# EAGLE board board-newparts-later-ripped-routed (EAGLE 9.5.2), part 1 of 2
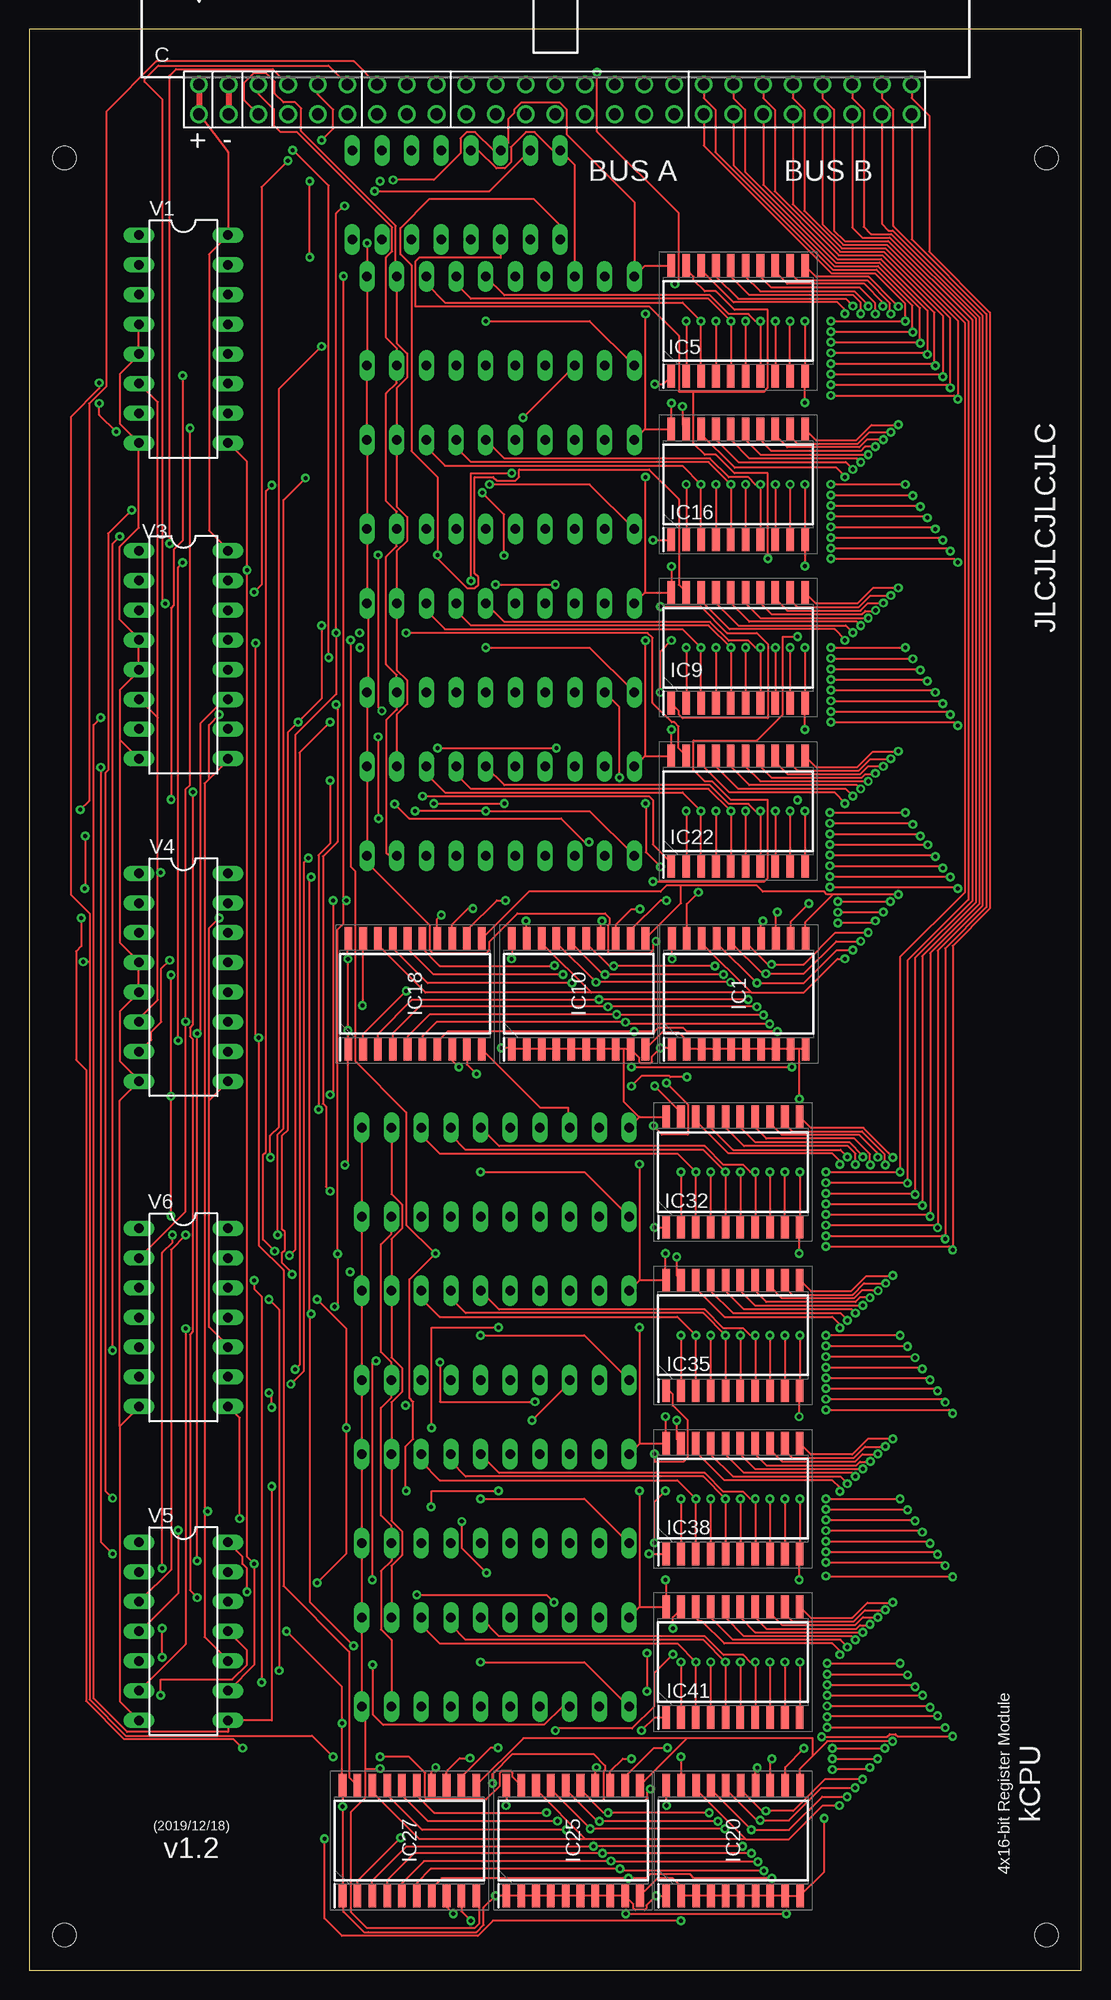
[diagram p0: board, top side]
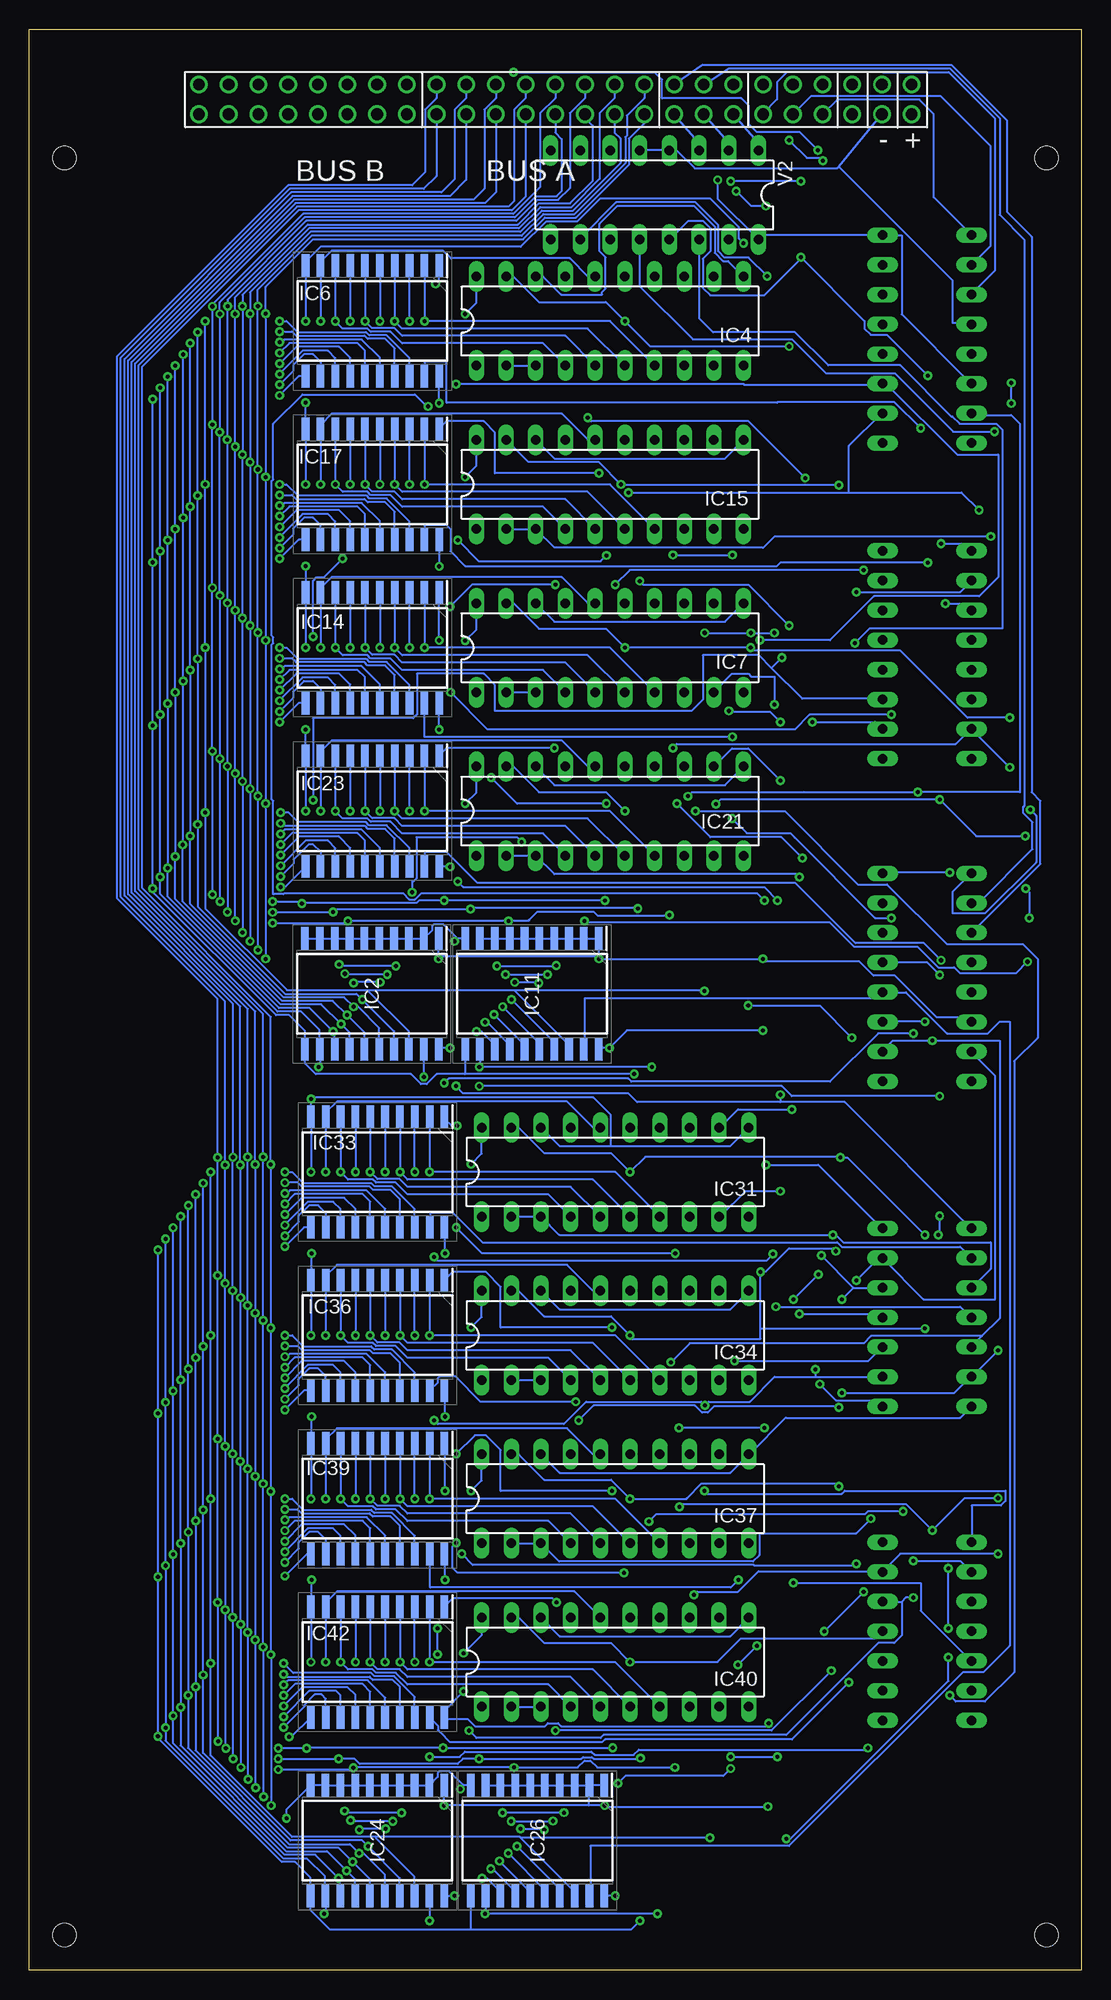
[diagram p1: board, bottom side, seen from below]

Size 90 x 166 mm. Coordinates in mm from the lower left corner, seen from the top.
Outline: 0,0 90,0 90,166 0,166 0,0
Copper layers (1*16): Top 0.035mm / dielectric 1.5mm / Bottom 0.035mm
Design rules "default *": minimum track width 6mil, minimum drill 0.35mm, track to track 6mil, track to pad 6mil, pad to pad 6mil, via to via 6mil, smd to smd 6mil, copper to edge 40mil, drill to drill 6mil, minimum pad ring 10mil, minimum via ring 8mil, stop-mask expansion 4mil, vias tented up to drill 0mil, thermal gap 10mil
Holes 2 mm at 87,155 3,155 3,3 87,3

## Footprints (pad centres in the part's own frame; a part is rotated, then mirrored left to right if it is on the bottom)
PAK100/2500-5-50 = drill 1 pad 1.422: 1 -30.48,-1.27; 2 -30.48,1.27; 3 -27.94,-1.27; 4 -27.94,1.27; 5 -25.4,-1.27; 6 -25.4,1.27; 7 -22.86,-1.27; 8 -22.86,1.27; 9 -20.32,-1.27; 10 -20.32,1.27; 11 -17.78,-1.27; 12 -17.78,1.27; 13 -15.24,-1.27; 14 -15.24,1.27; 15 -12.7,-1.27; 16 -12.7,1.27; 17 -10.16,-1.27; 18 -10.16,1.27; 19 -7.62,-1.27; 20 -7.62,1.27; 21 -5.08,-1.27; 22 -5.08,1.27; 23 -2.54,-1.27; 24 -2.54,1.27; 25 0,-1.27; 26 0,1.27; 27 2.54,-1.27; 28 2.54,1.27; 29 5.08,-1.27; 30 5.08,1.27; 31 7.62,-1.27; 32 7.62,1.27; 33 10.16,-1.27; 34 10.16,1.27; 35 12.7,-1.27; 36 12.7,1.27; 37 15.24,-1.27; 38 15.24,1.27; 39 17.78,-1.27; 40 17.78,1.27; 41 20.32,-1.27; 42 20.32,1.27; 43 22.86,-1.27; 44 22.86,1.27; 45 25.4,-1.27; 46 25.4,1.27; 47 27.94,-1.27; 48 27.94,1.27; 49 30.48,-1.27; 50 30.48,1.27
SOIC127P1030X265-20N = smd 1.95 x 0.65: 1 -4.725,5.715; 2 -4.725,4.445; 3 -4.725,3.175; 4 -4.725,1.905; 5 -4.725,0.635; 6 -4.725,-0.635; 7 -4.725,-1.905; 8 -4.725,-3.175; 9 -4.725,-4.445; 10 -4.725,-5.715; 11 4.725,-5.715; 12 4.725,-4.445; 13 4.725,-3.175; 14 4.725,-1.905; 15 4.725,-0.635; 16 4.725,0.635; 17 4.725,1.905; 18 4.725,3.175; 19 4.725,4.445; 20 4.725,5.715
DIL20 = drill 0.813 long: 1 -11.43,-3.81; 2 -8.89,-3.81; 3 -6.35,-3.81; 4 -3.81,-3.81; 5 -1.27,-3.81; 6 1.27,-3.81; 7 3.81,-3.81; 8 6.35,-3.81; 9 8.89,-3.81; 10 11.43,-3.81; 11 11.43,3.81; 12 8.89,3.81; 13 6.35,3.81; 14 3.81,3.81; 15 1.27,3.81; 16 -1.27,3.81; 17 -3.81,3.81; 18 -6.35,3.81; 19 -8.89,3.81; 20 -11.43,3.81
DIL16 = drill 0.813 long: 1 -8.89,-3.81; 2 -6.35,-3.81; 3 -3.81,-3.81; 4 -1.27,-3.81; 5 1.27,-3.81; 6 3.81,-3.81; 7 6.35,-3.81; 8 8.89,-3.81; 9 8.89,3.81; 10 6.35,3.81; 11 3.81,3.81; 12 1.27,3.81; 13 -1.27,3.81; 14 -3.81,3.81; 15 -6.35,3.81; 16 -8.89,3.81
DIL14 = drill 0.813 long: 1 -7.62,-3.81; 2 -5.08,-3.81; 3 -2.54,-3.81; 4 0,-3.81; 5 2.54,-3.81; 6 5.08,-3.81; 7 7.62,-3.81; 8 7.62,3.81; 9 5.08,3.81; 10 2.54,3.81; 11 0,3.81; 12 -2.54,3.81; 13 -5.08,3.81; 14 -7.62,3.81

## Placement (x,y rotation side)
C  2550-5  [PAK100/2500-5-50]  45,160 0 top
IC1  SN74CBT3345DW  [SOIC127P1030X265-20N]  60.69,83.5 90 top
IC2  SN74CBT3345DW  [SOIC127P1030X265-20N]  60.69,83.5 270 bottom
IC4  74HCT299N  [DIL20]  40.32,141.04 0 bottom
IC5  SN74CBT3345DW  [SOIC127P1030X265-20N]  60.64,141.04 90 top
IC6  SN74CBT3345DW  [SOIC127P1030X265-20N]  60.64,141.04 270 bottom
IC7  74HCT299N  [DIL20]  40.32,113.11 0 bottom
IC9  SN74CBT3345DW  [SOIC127P1030X265-20N]  60.64,113.11 90 top
IC10  SN74CBT3345DW  [SOIC127P1030X265-20N]  47,83.5 90 top
IC11  SN74CBT3345DW  [SOIC127P1030X265-20N]  47,83.5 270 bottom
IC14  SN74CBT3345DW  [SOIC127P1030X265-20N]  60.64,113.11 270 bottom
IC15  74HCT299N  [DIL20]  40.32,127.08 0 bottom
IC16  SN74CBT3345DW  [SOIC127P1030X265-20N]  60.64,127.08 90 top
IC17  SN74CBT3345DW  [SOIC127P1030X265-20N]  60.64,127.08 270 bottom
IC18  SN74CBT3345DW  [SOIC127P1030X265-20N]  33,83.5 90 top
IC20  SN74CBT3345DW  [SOIC127P1030X265-20N]  60.22,11.09 90 top
IC21  74HCT299N  [DIL20]  40.32,99.14 0 bottom
IC22  SN74CBT3345DW  [SOIC127P1030X265-20N]  60.64,99.14 90 top
IC23  SN74CBT3345DW  [SOIC127P1030X265-20N]  60.64,99.14 270 bottom
IC24  SN74CBT3345DW  [SOIC127P1030X265-20N]  60.22,11.09 270 bottom
IC25  SN74CBT3345DW  [SOIC127P1030X265-20N]  46.52,11.09 90 top
IC26  SN74CBT3345DW  [SOIC127P1030X265-20N]  46.52,11.09 270 bottom
IC27  SN74CBT3345DW  [SOIC127P1030X265-20N]  32.52,11.09 90 top
IC31  74HCT299N  [DIL20]  39.87,68.27 0 bottom
IC32  SN74CBT3345DW  [SOIC127P1030X265-20N]  60.19,68.27 90 top
IC33  SN74CBT3345DW  [SOIC127P1030X265-20N]  60.19,68.27 270 bottom
IC34  74HCT299N  [DIL20]  39.87,54.3 0 bottom
IC35  SN74CBT3345DW  [SOIC127P1030X265-20N]  60.19,54.3 90 top
IC36  SN74CBT3345DW  [SOIC127P1030X265-20N]  60.19,54.3 270 bottom
IC37  74HCT299N  [DIL20]  39.87,40.33 0 bottom
IC38  SN74CBT3345DW  [SOIC127P1030X265-20N]  60.19,40.33 90 top
IC39  SN74CBT3345DW  [SOIC127P1030X265-20N]  60.19,40.33 270 bottom
IC40  74HCT299N  [DIL20]  39.87,26.36 0 bottom
IC41  SN74CBT3345DW  [SOIC127P1030X265-20N]  60.19,26.36 90 top
IC42  SN74CBT3345DW  [SOIC127P1030X265-20N]  60.19,26.36 270 bottom
V1  74238N  [DIL16]  13.19,139.5 270 top
V2  74138N  [DIL16]  36.51,151.84 180 bottom
V3  74238N  [DIL16]  13.19,112.5 270 top
V4  74138N  [DIL16]  13.19,84.92 270 top
V5  7432N  [DIL14]  13.19,28.99 270 top
V6  7408N  [DIL14]  13.19,55.83 270 top

## Library data of the parts
C = con-3m; OC_FARNELL: 1788696; OC_NEWARK: unknown
IC1 IC2 IC5 IC6 IC9-IC11 IC14 IC16-IC18 IC20 IC22-IC27 IC32 IC33 IC35 IC36 IC38 IC39 IC41 IC42 = SamacSys_Parts; DESCRIPTION: Texas Instruments SN74CBT3345DW, Bus Switch, 8 x 1:1, 4.5 5.5 V, 20-Pin SOIC; HEIGHT: 2.65mm; MANUFACTURER_NAME: Texas Instruments; MANUFACTURER_PART_NUMBER: SN74CBT3345DW
IC4 IC7 IC15 IC21 IC31 IC34 IC37 IC40 = 74xx-eu
V1-V6 = 74ttl-din

## Nets
BUSA_BIT0: C.19 IC1.18 IC5.18 IC9.18 IC10.18 IC16.18 IC18.18 IC22.18
BUSA_BIT1: C.20 IC1.17 IC5.17 IC9.17 IC10.17 IC16.17 IC18.17 IC22.17
BUSA_BIT2: C.21 IC1.16 IC5.16 IC9.16 IC10.16 IC16.16 IC18.16 IC22.16
BUSA_BIT3: C.22 IC1.15 IC5.15 IC9.15 IC10.15 IC16.15 IC18.15 IC22.15
BUSA_BIT4: C.23 IC1.14 IC5.14 IC9.14 IC10.14 IC16.14 IC18.14 IC22.14
BUSA_BIT5: C.24 IC1.13 IC5.13 IC9.13 IC10.13 IC16.13 IC18.13 IC22.13
BUSA_BIT6: C.25 IC1.12 IC5.12 IC9.12 IC10.12 IC16.12 IC18.12 IC22.12
BUSA_BIT7: C.26 IC1.11 IC5.11 IC9.11 IC10.11 IC16.11 IC18.11 IC22.11
BUSA_BIT8: C.27 IC20.18 IC25.18 IC27.18 IC32.18 IC35.18 IC38.18 IC41.18
BUSA_BIT9: C.28 IC20.17 IC25.17 IC27.17 IC32.17 IC35.17 IC38.17 IC41.17
BUSA_BIT10: C.29 IC20.16 IC25.16 IC27.16 IC32.16 IC35.16 IC38.16 IC41.16
BUSA_BIT11: C.30 IC20.15 IC25.15 IC27.15 IC32.15 IC35.15 IC38.15 IC41.15
BUSA_BIT12: C.31 IC20.14 IC25.14 IC27.14 IC32.14 IC35.14 IC38.14 IC41.14
BUSA_BIT13: C.32 IC20.13 IC25.13 IC27.13 IC32.13 IC35.13 IC38.13 IC41.13
BUSA_BIT14: C.33 IC20.12 IC25.12 IC27.12 IC32.12 IC35.12 IC38.12 IC41.12
BUSA_BIT15: C.34 IC20.11 IC25.11 IC27.11 IC32.11 IC35.11 IC38.11 IC41.11
BUSA_REGIN0: C.7 V1.1
BUSA_REGIN1: C.9 V1.2
BUSA_REGIN2: C.11 V1.3
BUSA_REGOUT0: C.13 V2.1
BUSA_REGOUT1: C.15 V2.2
BUSA_REGOUT2: C.17 V2.3
BUSB_BIT0: C.35 IC2.18 IC6.18 IC11.18 IC14.18 IC17.18 IC18.2 IC23.18
BUSB_BIT1: C.36 IC2.17 IC6.17 IC11.17 IC14.17 IC17.17 IC18.3 IC23.17
BUSB_BIT2: C.37 IC2.16 IC6.16 IC11.16 IC14.16 IC17.16 IC18.4 IC23.16
BUSB_BIT3: C.38 IC2.15 IC6.15 IC11.15 IC14.15 IC17.15 IC18.5 IC23.15
BUSB_BIT4: C.39 IC2.14 IC6.14 IC11.14 IC14.14 IC17.14 IC18.6 IC23.14
BUSB_BIT5: C.40 IC2.13 IC6.13 IC11.13 IC14.13 IC17.13 IC18.7 IC23.13
BUSB_BIT6: C.41 IC2.12 IC6.12 IC11.12 IC14.12 IC17.12 IC18.8 IC23.12
BUSB_BIT7: C.42 IC2.11 IC6.11 IC11.11 IC14.11 IC17.11 IC18.9 IC23.11
BUSB_BIT8: C.43 IC24.18 IC26.18 IC27.2 IC33.18 IC36.18 IC39.18 IC42.18
BUSB_BIT9: C.44 IC24.17 IC26.17 IC27.3 IC33.17 IC36.17 IC39.17 IC42.17
BUSB_BIT10: C.45 IC24.16 IC26.16 IC27.4 IC33.16 IC36.16 IC39.16 IC42.16
BUSB_BIT11: C.46 IC24.15 IC26.15 IC27.5 IC33.15 IC36.15 IC39.15 IC42.15
BUSB_BIT12: C.47 IC24.14 IC26.14 IC27.6 IC33.14 IC36.14 IC39.14 IC42.14
BUSB_BIT13: C.48 IC24.13 IC26.13 IC27.7 IC33.13 IC36.13 IC39.13 IC42.13
BUSB_BIT14: C.49 IC24.12 IC26.12 IC27.8 IC33.12 IC36.12 IC39.12 IC42.12
BUSB_BIT15: C.50 IC24.11 IC26.11 IC27.9 IC33.11 IC36.11 IC39.11 IC42.11
BUSB_REGIN0: C.8 V3.1
BUSB_REGIN1: C.10 V3.2
BUSB_REGIN2: C.12 V3.3
BUSB_REGOUT0: C.14 V4.1
BUSB_REGOUT1: C.16 V4.2
BUSB_REGOUT2: C.18 V4.3
CLK: C.5 IC4.12 IC7.12 IC15.12 IC21.12 IC31.12 IC34.12 IC37.12 IC40.12
GND: C.3 C.4 IC1.2 IC1.3 IC1.4 IC1.5 IC1.6 IC1.7 IC1.8 IC1.9 IC1.10 IC2.2 IC2.3 IC2.4 IC2.5 IC2.6 IC2.7 IC2.8 IC2.9 IC2.10 IC4.10 IC4.11 IC4.18 IC5.10 IC6.10 IC7.10 IC7.11 IC7.18 IC9.10 IC10.10 IC11.10 IC14.10 IC15.10 IC15.11 IC15.18 IC16.10 IC17.10 IC18.10 IC20.2 IC20.3 IC20.4 IC20.5 IC20.6 IC20.7 IC20.8 IC20.9 IC20.10 IC21.10 IC21.11 IC21.18 IC22.10 IC23.10 IC24.2 IC24.3 IC24.4 IC24.5 IC24.6 IC24.7 IC24.8 IC24.9 IC24.10 IC25.10 IC26.10 IC27.10 IC31.10 IC31.11 IC31.18 IC32.10 IC33.10 IC34.10 IC34.11 IC34.18 IC35.10 IC36.10 IC37.10 IC37.11 IC37.18 IC38.10 IC39.10 IC40.10 IC40.11 IC40.18 IC41.10 IC42.10 V1.4 V1.5 V1.8 V2.4 V2.5 V2.8 V3.4 V3.5 V3.8 V4.4 V4.5 V4.8 V5.7 V6.7
N$1: IC34.16 IC35.9 IC36.9
N$2: IC16.1 IC35.1 V1.10 V5.4
N$3: IC16.19 IC35.19 V2.10 V6.4
N$4: IC4.2 IC4.3 IC31.2 IC31.3 V6.3
N$5: IC4.7 IC5.2 IC6.2
N$6: IC4.13 IC5.3 IC6.3
N$7: IC4.6 IC5.4 IC6.4
N$8: IC4.14 IC5.5 IC6.5
N$9: IC4.5 IC5.6 IC6.6
N$10: IC4.15 IC5.7 IC6.7
N$11: IC4.4 IC5.8 IC6.8
N$12: IC5.1 IC32.1 V1.11 V5.1
N$13: IC10.19 IC25.19 V2.12
N$14: IC5.19 IC32.19 V2.11 V6.1
N$15: IC4.16 IC5.9 IC6.9
N$17: IC6.19 IC33.19 V4.11 V6.2
N$18: IC15.1 IC15.19 IC34.1 IC34.19 V5.6
N$19: IC15.2 IC15.3 IC34.2 IC34.3 V6.6
N$20: IC4.1 IC4.19 IC31.1 IC31.19 V5.3
N$22: IC7.7 IC9.2 IC14.2
N$23: IC7.13 IC9.3 IC14.3
N$24: IC7.6 IC9.4 IC14.4
N$25: IC7.14 IC9.5 IC14.5
N$26: IC17.1 IC36.1 V3.10 V5.5
N$27: IC17.19 IC36.19 V4.10 V6.5
N$28: IC7.5 IC9.6 IC14.6
N$29: IC14.1 IC39.1 V3.9 V5.10
N$30: IC7.1 IC7.19 IC37.1 IC37.19 V5.8
N$31: IC7.2 IC7.3 IC37.2 IC37.3 V6.8
N$32: IC23.1 IC42.1 V3.7 V5.13
N$33: IC9.1 IC38.1 V1.9 V5.9
N$34: IC9.19 IC38.19 V2.9 V6.9
N$35: IC7.15 IC9.7 IC14.7
N$36: IC7.4 IC9.8 IC14.8
N$37: IC7.16 IC9.9 IC14.9
N$39: IC1.19 IC20.19 V2.13
N$40: IC14.19 IC39.19 V4.9 V6.10
N$41: IC15.7 IC16.2 IC17.2
N$42: IC15.13 IC16.3 IC17.3
N$43: IC15.6 IC16.4 IC17.4
N$44: IC15.14 IC16.5 IC17.5
N$45: IC15.5 IC16.6 IC17.6
N$46: IC15.15 IC16.7 IC17.7
N$47: IC15.4 IC16.8 IC17.8
N$48: IC15.16 IC16.9 IC17.9
N$50: IC21.1 IC21.19 IC40.1 IC40.19 V5.11
N$51: IC22.1 IC41.1 V1.7 V5.12
N$52: IC23.19 IC42.19 V4.7 V6.13
N$54: IC18.19 IC27.19 V2.14
N$55: IC22.19 IC41.19 V2.7 V6.12
N$58: IC11.19 IC26.19 V4.12
N$61: IC2.19 IC24.19 V4.13
N$63: IC21.7 IC22.2 IC23.2
N$64: IC21.13 IC22.3 IC23.3
N$65: IC21.6 IC22.4 IC23.4
N$66: IC21.14 IC22.5 IC23.5
N$67: IC21.5 IC22.6 IC23.6
N$68: IC21.15 IC22.7 IC23.7
N$69: IC21.4 IC22.8 IC23.8
N$70: IC21.16 IC22.9 IC23.9
N$121: IC31.7 IC32.2 IC33.2
N$122: IC31.13 IC32.3 IC33.3
N$125: IC31.6 IC32.4 IC33.4
N$126: IC31.14 IC32.5 IC33.5
N$129: IC31.5 IC32.6 IC33.6
N$130: IC31.15 IC32.7 IC33.7
N$131: IC31.4 IC32.8 IC33.8
N$132: IC31.16 IC32.9 IC33.9
N$133: IC34.7 IC35.2 IC36.2
N$134: IC34.13 IC35.3 IC36.3
N$135: IC34.6 IC35.4 IC36.4
N$136: IC34.14 IC35.5 IC36.5
N$139: IC34.5 IC35.6 IC36.6
N$140: IC34.15 IC35.7 IC36.7
N$141: IC34.4 IC35.8 IC36.8
N$143: IC37.7 IC38.2 IC39.2
N$144: IC37.13 IC38.3 IC39.3
N$145: IC37.6 IC38.4 IC39.4
N$146: IC37.14 IC38.5 IC39.5
N$149: IC37.5 IC38.6 IC39.6
N$150: IC37.15 IC38.7 IC39.7
N$151: IC37.4 IC38.8 IC39.8
N$152: IC37.16 IC38.9 IC39.9
N$153: IC40.7 IC41.2 IC42.2
N$154: IC40.13 IC41.3 IC42.3
N$155: IC40.6 IC41.4 IC42.4
N$156: IC40.14 IC41.5 IC42.5
N$157: IC21.2 IC21.3 IC40.2 IC40.3 V6.11
N$159: IC40.5 IC41.6 IC42.6
N$160: IC40.15 IC41.7 IC42.7
N$161: IC40.4 IC41.8 IC42.8
N$162: IC40.16 IC41.9 IC42.9
N$163: IC6.1 IC33.1 V3.11 V5.2
STARTUP: C.6 IC4.9 IC7.9 IC15.9 IC21.9 IC31.9 IC34.9 IC37.9 IC40.9
VCC: C.1 C.2 IC1.1 IC1.20 IC2.1 IC2.20 IC4.20 IC5.20 IC6.20 IC7.20 IC9.20 IC10.1 IC10.2 IC10.3 IC10.4 IC10.5 IC10.6 IC10.7 IC10.8 IC10.9 IC10.20 IC11.1 IC11.2 IC11.3 IC11.4 IC11.5 IC11.6 IC11.7 IC11.8 IC11.9 IC11.20 IC14.20 IC15.20 IC16.20 IC17.20 IC18.1 IC18.20 IC20.1 IC20.20 IC21.20 IC22.20 IC23.20 IC24.1 IC24.20 IC25.1 IC25.2 IC25.3 IC25.4 IC25.5 IC25.6 IC25.7 IC25.8 IC25.9 IC25.20 IC26.1 IC26.2 IC26.3 IC26.4 IC26.5 IC26.6 IC26.7 IC26.8 IC26.9 IC26.20 IC27.1 IC27.20 IC31.20 IC32.20 IC33.20 IC34.20 IC35.20 IC36.20 IC37.20 IC38.20 IC39.20 IC40.20 IC41.20 IC42.20 V1.6 V1.16 V2.6 V2.16 V3.6 V3.16 V4.6 V4.16 V5.14 V6.14

## Tracks (layer width: path | path; a pad name or v marks a point on that pad's centre or on a via)
BUSA_BIT0  (via drill 0.35)
  Top 0.152: v69.78,141.68 69.78,142 69.13,142.65 60.24,142.65 57.38,145.51 57.34,145.51 IC5.18 | v69.78,127.71 69.78,127.78 69.06,128.5 60.35,128.5 57.34,131.51 IC16.18 | v69.78,113.74 69.78,113.81 68.9,114.69 59.89,114.69 57.45,117.14 57.45,117.86 57.47,117.87 IC9.18 | v69.78,99.77 69.78,99.84 68.9,100.72 59.89,100.72 57.47,103.15 IC22.18 | 61.77,83.62 66.25,83.62 69.13,86.5 v69.78,86.5 | IC1.18 57.52,87.87 61.77,83.62 | 61.77,83.62 48.08,83.62 | IC10.18 43.83,87.87 48.08,83.62 | 48.08,83.62 33.88,83.62 29.82,87.67 IC18.18
  Bottom 0.152: v69.78,86.5 v69.78,99.77 v69.78,113.74 v69.78,127.71 v69.78,141.68 69.78,143.97 65.72,148.03 47.75,148.03 45.9,149.88 43.23,149.88 38.71,154.41 38.71,156.64 37.38,157.97 C.19
BUSA_BIT1  (via drill 0.35)
  Top 0.152: v70.44,142.33 70.44,142.36 69.85,142.95 60.64,142.95 58.74,144.85 IC5.17 | v70.44,128.36 70.44,128.39 69.85,128.98 60.64,128.98 58.74,130.88 IC16.17 | v70.44,114.39 70.44,114.42 69.85,115.01 60.64,115.01 58.74,116.92 IC9.17 | v70.44,100.42 70.44,100.45 69.85,101.04 60.64,101.04 58.74,102.94 IC22.17 | IC1.17 58.79,87.87 v62.24,84.42 66.25,84.42 69.08,87.25 v70.44,87.25 | IC10.17 45.09,87.87 v48.47,84.5 v60,84.5 | v46.42,84.42 34.08,84.42 31.09,87.41 IC18.17
  Bottom 0.152: v70.44,87.25 v70.44,100.42 v70.44,114.39 v70.44,128.36 v70.44,142.33 70.44,143.74 65.85,148.34 47.88,148.34 46.02,150.19 43.36,150.19 39.01,154.53 39.01,156.77 38.89,156.89 38.89,158.61 37.38,160.12 C.20 | v60,84.5 62.16,84.5 v62.24,84.42 | v48.47,84.5 46.5,84.5 v46.42,84.42
BUSA_BIT2  (via drill 0.35)
  Top 0.152: v71.12,141.68 71.12,142.63 70.48,143.27 61.59,143.27 60.01,144.85 IC5.16 | v71.12,128.98 70.8,129.3 61.59,129.3 60.01,130.88 IC16.16 | v71.12,115.01 70.8,115.33 61.59,115.33 60.01,116.92 IC9.16 | v71.12,101.04 70.8,101.36 61.59,101.36 60.01,102.94 IC22.16 | IC1.16 60.06,87.87 62.7,85.23 v63,85.23 66.25,85.23 69.02,88 v71.12,88 | v59.37,85.16 v49.25,85.16 49.08,85.16 46.37,87.87 IC10.16 | v45.67,85.17 34.58,85.17 32.25,87.5 32.25,88.11 IC18.16
  Bottom 0.152: v71.12,88 v71.12,101.04 v71.12,115.01 v71.12,128.98 v71.12,141.68 71.12,143.49 65.95,148.66 47.98,148.66 46.15,150.49 43.48,150.49 39.43,154.54 39.43,156.68 39.92,157.16 C.21 | v59.37,85.16 62.93,85.16 v63,85.23 | v49.25,85.16 v45.68,85.16 v45.67,85.17
BUSA_BIT3  (via drill 0.35)
  Top 0.152: IC5.15 61.28,144.85 62.53,143.6 70.59,143.6 71.76,142.42 v71.76,142.32 | IC16.15 61.28,130.88 62.53,129.63 v71.76,129.63 v71.76,129.62 | IC9.15 61.28,116.92 62.53,115.66 v71.76,115.66 v71.76,115.65 | IC22.15 61.28,102.94 62.54,101.68 v71.76,101.68 | v71.76,88.75 v71.76,88.74 68.96,88.74 66.25,86.03 v63.5,86.03 63.17,86.03 61.33,87.87 IC1.15 | IC10.15 47.68,88.18 47.68,87.83 49.62,85.89 v50,85.89 v58.64,85.89 | IC18.15 33.5,88.09 33.5,87.5 35.11,85.89 44.89,85.89 v44.92,85.92
  Bottom 0.152: v71.76,88.75 v71.76,101.68 v71.76,115.65 v71.76,129.62 v71.76,142.32 71.76,143.28 66.07,148.97 48.1,148.97 46.28,150.8 43.61,150.8 41.21,153.2 41.21,158.83 39.92,160.12 C.22 | v58.64,85.89 63.36,85.89 v63.5,86.03 | v50,85.89 44.95,85.89 v44.92,85.92
BUSA_BIT4  (via drill 0.35, 0.35 pad 0.55)
  Top 0.152: IC5.14 62.55,144.85 63.5,143.9 71.04,143.9 72.37,142.57 72.37,141.67 v72.39,141.65 | IC16.14 62.55,130.88 63.5,129.93 71.12,129.93 71.49,130.3 v72.37,130.3 | IC9.14 62.55,116.92 63.5,115.96 71.21,115.96 71.51,116.26 72.35,116.26 v72.39,116.31 | IC22.14 62.55,102.94 63.5,101.99 71.21,101.99 71.51,102.29 72.3,102.29 v72.37,102.36 | v69.17,89.58 72.19,89.58 v72.37,89.75 | IC1.14 62.6,89.58 v62.75,89.73 | IC10.14 48.91,89.66 v49,89.75 | IC18.14 34.91,89.91 v35.25,90.25
  Bottom 0.152: 72.37,116.33 v72.37,102.36 v72.37,89.75 | v72.39,116.31 72.37,116.33 | 72.37,116.33 v72.37,130.3 72.37,141.63 v72.39,141.65 72.37,141.67 72.37,143.11 66.17,149.3 48.2,149.3 46.4,151.1 43.74,151.1 41.82,153.02 41.82,157.75 42.46,158.39 C.23 | v69.17,89.58 62.91,89.58 v62.75,89.73 62.73,89.75 v49,89.75 47.25,89.75 47.25,89.82 46.57,90.5 41.68,90.5 41.38,90.19 35.3,90.19 v35.25,90.25
BUSA_BIT5  (via drill 0.35, 0.35 pad 0.55)
  Top 0.152: IC5.13 63.82,145.25 64.85,144.22 71.44,144.22 73.03,142.63 v73.03,142.31 | IC16.13 63.82,131.28 64.85,130.25 71.01,130.25 71.66,130.91 72.62,130.91 72.63,130.9 v73.06,130.9 | IC9.13 63.82,117.31 64.85,116.28 71.1,116.28 71.73,116.91 73.02,116.91 v73.05,116.94 | IC22.13 63.82,103.34 64.85,102.31 71.1,102.31 71.76,102.97 v73.05,102.97 | v69.17,90.48 73.03,90.48 v73.05,90.5 | v64,90.5 63.87,90.37 IC1.13 | IC10.13 50.17,89.42 51.5,90.75 v52.25,90.75 | IC18.13 36.17,89.42 37.55,90.8 v37.95,90.8
  Bottom 0.152: 73.05,130.57 v73.05,116.94 v73.05,102.97 v73.05,90.5 | 73.05,130.57 73.06,130.58 v73.06,130.9 | 73.05,142.29 v73.03,142.31 | 73.05,130.57 73.05,142.29 | 73.05,142.29 73.05,142.86 66.3,149.6 48.33,149.6 46.53,151.41 44.77,151.41 43.75,152.42 43.75,158.83 42.46,160.12 C.24 | v69.17,90.48 64.02,90.48 v64,90.5 63.75,90.75 v52.25,90.75 52.12,90.88 38.02,90.88 v37.95,90.8
BUSA_BIT6  (via drill 0.35, 0.35 pad 0.55)
  Top 0.152: IC5.12 65.09,145.16 65.72,144.53 71.67,144.53 73.63,142.57 73.63,141.71 v73.69,141.65 | IC16.12 65.09,131.19 65.72,130.56 70.88,130.56 71.86,131.53 v73.71,131.53 | IC9.12 65.09,117.22 65.72,116.58 70.97,116.58 71.93,117.55 73.66,117.55 v73.69,117.58 | IC22.12 65.09,103.25 65.72,102.61 70.97,102.61 71.93,103.58 73.66,103.58 v73.69,103.61 | v69.17,91.39 v73.66,91.39 | IC18.12 37.45,88.94 40,91.5 v40.75,91.5 | v54.5,91.5 54,91.5 51.45,88.94 IC10.12 | IC1.12 65.14,89.68 v66.68,91.22
  Bottom 0.152: v73.69,103.61 v73.69,117.58 73.69,131.84 | v73.69,103.61 | 73.69,131.84 73.71,131.82 v73.71,131.53 | 73.69,141.68 73.69,131.84 | 73.69,141.68 v73.69,141.65 73.69,142.65 66.43,149.91 48.46,149.91 46.66,151.71 44.9,151.71 44.45,152.16 44.45,156.62 45,157.16 C.25 | 73.69,141.68 | v73.69,103.61 73.69,91.43 v73.66,91.39 | v69.17,91.39 66.85,91.39 v66.68,91.22 66.61,91.28 56.87,91.28 56.65,91.5 v54.5,91.5 v40.75,91.5
BUSA_BIT7  (via drill 0.35, 0.35 pad 0.55)
  Top 0.152: IC5.11 67.3,144.83 71.8,144.83 73.94,142.69 v74.33,142.29 | IC9.11 67.3,116.89 70.85,116.89 72.18,118.22 v74.33,118.22 | IC22.11 67.3,102.92 70.85,102.92 72.15,104.22 74.3,104.22 v74.33,104.25 | IC16.11 67.3,130.86 70.75,130.86 72.04,132.14 74.28,132.14 v74.33,132.19 | v74.33,118.22 | v74.33,92 68.75,92 | IC1.11 66.41,89.66 68.75,92 | 68.75,92 68.25,92 68,92.25 62.75,92.25 62.2,92.8 55.75,92.8 | IC18.11 42.74,92.25 54,92.25 54.55,92.8 55.75,92.8 | IC10.11 55.75,91.26 55.75,92.8
  Bottom 0.152: v74.33,118.22 v74.33,104.25 v74.33,92 | v74.33,118.22 | v74.33,118.22 v74.33,132.19 | v74.33,132.19 | v74.33,142.29 | v74.33,142.29 74.33,142.44 66.55,150.21 48.58,150.21 46.29,152.51 46.29,158.83 45,160.12 C.26 | v74.33,142.29 v74.33,132.19
BUSA_BIT8  (via drill 0.35)
  Top 0.152: v69.33,68.9 69.33,69.22 68.69,69.87 59.79,69.87 56.93,72.73 56.89,72.73 IC32.18 | v69.33,54.93 69.33,55.25 68.7,55.88 59.45,55.88 57.02,58.31 IC35.18 | v69.33,40.96 69.33,41.28 68.7,41.91 59.45,41.91 57.09,44.27 57.09,44.99 IC38.18 | v69.33,26.99 69.33,27.31 68.7,27.94 59.45,27.94 57.54,29.85 57.34,29.85 57.02,30.17 IC41.18 | 61.3,11.21 65,11.21 67.88,14.09 v69.3,14.09 | IC20.18 57.04,15.46 61.3,11.21 | 61.3,11.21 47.6,11.21 | IC25.18 43.35,15.46 47.6,11.21 | 47.6,11.21 33.41,11.21 29.35,15.27 IC27.18
  Bottom 0.152: v69.3,14.09 69.3,26.78 69.33,26.81 v69.33,26.99 v69.33,40.96 v69.33,54.93 v69.33,68.9 69.33,81.54 80.33,92.53 80.33,137.16 66.97,150.52 48.71,150.52 47.54,151.69 C.27
BUSA_BIT9  (via drill 0.35)
  Top 0.152: v69.99,69.55 69.99,69.58 69.4,70.17 60.19,70.17 58.29,72.08 IC32.17 | v69.99,55.58 69.99,55.61 69.4,56.2 60.19,56.2 58.29,58.11 IC35.17 | v69.99,41.61 69.99,41.64 69.4,42.23 60.19,42.23 58.29,44.14 IC38.17 | v69.99,27.64 69.99,27.67 69.4,28.26 60.19,28.26 58.29,30.17 IC41.17 | IC20.17 58.31,15.46 v61.76,12.01 65,12.01 67.83,14.84 v69.96,14.84 | IC25.17 44.62,15.46 v47.99,12.09 v59.52,12.09 | v45.94,12.01 33.6,12.01 30.62,14.99 IC27.17
  Bottom 0.152: v69.99,27.64 69.99,28 | 69.99,28 v69.99,41.61 v69.99,55.58 v69.99,69.55 69.99,81.77 80.63,92.41 80.63,137.28 67.09,150.82 49,150.82 48.52,151.3 48.52,159.14 47.54,160.12 C.28 | v59.52,12.09 61.68,12.09 v61.76,12.01 | v47.99,12.09 46.02,12.09 v45.94,12.01 | v69.96,14.84 69.96,27.97 69.99,28
BUSA_BIT10  (via drill 0.35)
  Top 0.152: v70.67,68.9 70.67,69.85 70.04,70.49 61.15,70.49 59.56,72.08 IC32.16 | v70.67,56.2 70.35,56.52 61.15,56.52 59.56,58.11 IC35.16 | v70.67,42.23 70.35,42.55 61.15,42.55 59.56,44.14 IC38.16 | v70.67,28.26 70.35,28.58 61.15,28.58 59.56,30.17 IC41.16 | IC20.16 59.58,15.46 62.23,12.82 v62.52,12.82 65,12.82 67.77,15.59 v70.64,15.59 | v58.9,12.75 v48.77,12.75 48.6,12.75 45.89,15.46 IC25.16 | v45.19,12.76 34.1,12.76 31.77,15.09 31.77,15.7 IC27.16
  Bottom 0.152: v58.9,12.75 62.45,12.75 v62.52,12.82 | v48.77,12.75 45.2,12.75 v45.19,12.76 | v70.64,15.59 70.67,15.62 v70.67,28.26 v70.67,42.23 v70.67,56.2 v70.67,68.9 70.67,82.02 80.94,92.28 80.94,137.41 67.22,151.13 51,151.13 50.08,152.05 C.29
BUSA_BIT11  (via drill 0.35)
  Top 0.152: IC32.15 60.83,72.08 62.09,70.82 70.14,70.82 71.31,69.64 v71.31,69.54 | IC35.15 60.83,58.11 62.09,56.85 v71.31,56.85 v71.31,56.84 | IC38.15 60.83,44.14 62.09,42.88 v71.31,42.88 v71.31,42.87 | IC41.15 60.83,30.17 62.09,28.9 v71.31,28.9 | v71.28,16.34 v71.28,16.33 68.07,16.33 65.36,13.62 v63.02,13.62 62.69,13.62 60.85,15.46 IC20.15 | IC25.15 47.2,15.77 47.2,15.42 49.14,13.48 v49.52,13.48 v58.16,13.48 | IC27.15 33.02,15.68 33.02,15.09 34.63,13.48 v44.25,13.48
  Bottom 0.152: v58.16,13.48 62.88,13.48 v63.02,13.62 | v71.28,16.34 71.28,28.87 v71.31,28.9 v71.31,42.87 v71.31,56.84 v71.31,69.54 71.31,82.23 81.24,92.16 81.24,137.54 67.34,151.43 52,151.43 51.06,152.37 51.06,159.14 50.08,160.12 C.30 | v44.25,13.48 v49.52,13.48
BUSA_BIT12  (via drill 0.35, 0.35 pad 0.55)
  Top 0.152: IC32.14 62.1,72.08 63.05,71.12 70.59,71.12 71.92,69.8 71.92,68.89 v71.94,68.87 | IC35.14 62.1,58.11 63.05,57.15 70.67,57.15 71.04,57.52 v71.92,57.52 | IC38.14 62.1,44.14 63.05,43.18 70.77,43.18 71.06,43.48 71.9,43.48 v71.95,43.53 | IC41.14 62.1,30.17 63.05,29.21 70.77,29.21 71.06,29.51 71.85,29.51 v71.92,29.58 | v68.69,17.17 71.72,17.17 v71.89,17.34 | IC20.14 62.12,17.17 v62.27,17.32 | IC25.14 48.43,17.25 v48.52,17.34 | IC27.14 34.43,17 v34.77,17.34
  Bottom 0.152: 71.92,43.55 v71.92,29.58 71.92,17.37 v71.89,17.34 | v71.95,43.53 71.92,43.55 | 71.92,43.55 v71.92,57.52 71.92,68.85 v71.94,68.87 71.94,82.42 81.55,92.03 81.55,137.66 67.47,151.74 54,151.74 52.62,153.12 C.31 | v68.69,17.17 62.43,17.17 v62.27,17.32 62.25,17.34 v48.52,17.34 43.09,17.34 42.5,17.93 42,17.93 41.41,17.34 v34.77,17.34
BUSA_BIT13  (via drill 0.35, 0.35 pad 0.55)
  Top 0.152: IC32.13 63.37,72.47 64.4,71.44 70.99,71.44 72.58,69.85 v72.58,69.54 | IC35.13 63.37,58.51 64.4,57.47 70.56,57.47 71.22,58.13 72.17,58.13 72.18,58.12 v72.61,58.12 | IC38.13 63.37,44.53 64.4,43.5 70.65,43.5 71.28,44.13 72.57,44.13 v72.6,44.16 | IC41.13 63.37,30.57 64.4,29.53 70.65,29.53 71.31,30.19 v72.6,30.19 | v68.69,18.07 72.55,18.07 v72.57,18.09 | v63.52,18.09 63.39,17.96 IC20.13 | IC25.13 49.7,17.02 50.77,18.09 v51.52,18.09 | IC27.13 35.7,17.02 36.83,18.14 v37.72,18.14
  Bottom 0.152: v68.69,18.07 63.54,18.07 v63.52,18.09 62.18,18.09 61.74,17.64 53.35,17.64 52.91,18.09 v51.52,18.09 42.77,18.09 42.63,18.23 41.87,18.23 41.73,18.09 37.77,18.09 v37.72,18.14 | v72.57,18.09 72.57,30.16 v72.6,30.19 v72.6,44.16 72.6,58.11 v72.61,58.12 72.61,69.5 v72.58,69.54 72.58,82.63 81.85,91.9 81.85,137.79 67.6,152.04 54.75,152.04 53.6,153.19 53.6,159.14 52.62,160.12 C.32
BUSA_BIT14  (via drill 0.35, 0.35 pad 0.55)
  Top 0.152: IC32.12 64.64,72.38 65.27,71.75 71.22,71.75 73.18,69.79 73.18,68.93 v73.24,68.87 | IC35.12 64.64,58.41 65.27,57.78 70.43,57.78 71.41,58.76 v73.26,58.76 | IC38.12 64.64,44.44 65.27,43.81 70.53,43.81 71.49,44.77 73.21,44.77 v73.24,44.8 | IC41.12 64.64,30.47 65.27,29.84 70.53,29.84 71.49,30.8 73.21,30.8 v73.24,30.83 | IC20.12 64.66,17.37 v66.27,18.98 | v68.69,18.98 v73.18,18.98 | IC25.12 50.97,16.54 53.46,19.02 v54.59,19.02 | v40.09,19.02 39.46,19.02 36.97,16.54 IC27.12
  Bottom 0.152: v73.24,30.83 v73.24,44.8 73.24,59.06 | v73.24,30.83 | 73.24,59.06 v73.24,68.87 | 73.24,59.06 73.26,59.04 v73.26,58.76 | v73.24,68.87 | v73.24,68.87 73.24,82.86 82.16,91.78 82.16,137.92 67.72,152.35 56.25,152.35 55.16,153.44 C.33 | v66.27,18.98 66.52,18.98 | 66.52,18.98 v68.69,18.98 | 66.52,18.98 66.48,19.02 v54.59,19.02 v40.09,19.02 | v73.24,30.83 73.24,19.05 v73.18,18.98
BUSA_BIT15  (via drill 0.35, 0.35 pad 0.55)
  Top 0.152: IC32.11 66.85,72.05 71.35,72.05 73.49,69.91 v73.89,69.52 | IC38.11 66.85,44.11 70.4,44.11 71.73,45.44 v73.89,45.44 | IC41.11 66.85,30.14 70.4,30.14 71.7,31.44 73.85,31.44 v73.89,31.47 | IC35.11 66.85,58.08 70.31,58.08 71.59,59.36 73.83,59.36 v73.89,59.41 | v73.89,45.44 | v73.86,19.59 68.27,19.59 67,18.32 | IC25.11 56.26,19.84 | 56.26,19.84 67,19.84 67,18.32 | IC20.11 65.93,17.25 67,18.32 | 56.26,19.84 42.26,19.84 IC27.11
  Bottom 0.152: v73.89,45.44 v73.89,31.47 73.89,19.62 v73.86,19.59 | v73.89,45.44 | v73.89,45.44 v73.89,59.41 | v73.89,59.41 | v73.89,69.52 | v73.89,59.41 v73.89,69.52 | v73.89,69.52 73.89,83.07 82.46,91.65 82.46,138.04 67.85,152.65 57.25,152.65 56.14,153.76 56.14,159.14 55.16,160.12 C.34
BUSA_REGIN0
  Bottom 0.152: V1.1 9.5,148.5 12.62,151.62 12.62,158.75 13.86,159.98 20.89,159.98 C.7
BUSA_REGIN1
  Bottom 0.152: V1.2 9.38,145.88 7.75,147.5 7.75,156 12.04,160.29 23.12,160.29 C.9
BUSA_REGIN2
  Bottom 0.152: V1.3 9.38,143.38 7.38,145.38 7.38,158.35 11.35,162.33 16.98,162.33 17,162.35 25.15,162.35 26.03,161.47 26.03,160 27.22,158.81 C.11
BUSA_REGOUT0
  Bottom 0.152: V2.1 27.62,156.28 C.13
BUSA_REGOUT1
  Bottom 0.152: V2.2 30.16,156.28 C.15
BUSA_REGOUT2
  Bottom 0.152: V2.3 32.7,156.28 C.17
BUSB_BIT0  (via drill 0.35)
  Top 0.152: v68.58,141.04 v74.94,141.04 74.94,142.55 72.35,145.13 68.62,145.13 57.7,156.05 C.35 | v68.58,113.11 v74.94,113.11 | v74.94,127.08 v68.58,127.08 | IC18.2 28.55,80.06 v32.25,83.75 | v68.5,99 v74.94,99
  Bottom 0.152: IC6.18 57.47,137.87 59.43,139.83 60.92,139.83 61.2,140.1 67.06,140.1 68,141.04 v68.58,141.04 | IC17.18 57.47,123.9 59.43,125.86 60.92,125.86 61.2,126.14 67.06,126.14 68,127.08 v68.58,127.08 | IC14.18 57.47,109.93 59.43,111.89 60.92,111.89 61.2,112.17 67.06,112.17 68,113.11 v68.58,113.11 | IC23.18 57.47,95.96 59.43,97.92 60.92,97.92 61.2,98.19 67,98.19 67.81,99 v68.5,99 | 74.94,126.76 v74.94,113.11 v74.94,99 74.94,90.8 67.95,83.81 61.06,83.81 61,83.75 | 74.94,126.76 v74.94,141.04 | v74.94,141.04 | 74.94,126.76 v74.94,127.08 | IC2.18 57.52,80.27 61,83.75 | 48.51,83.81 61,83.81 61,83.75 | IC11.18 43.83,79.13 48.51,83.81 | 48.51,83.81 46.67,83.81 32.31,83.81 v32.25,83.75
BUSB_BIT1  (via drill 0.35, 0.35 pad 0.55)
  Top 0.152: v68.58,126.17 75.53,126.17 v75.58,126.12 | v68.58,112.2 75.54,112.2 v75.58,112.15 | v68.58,140.14 75.53,140.14 v75.58,140.09 75.55,140.12 75.55,142.37 72.48,145.44 68.74,145.44 58.68,155.5 58.68,159.14 57.7,160.12 C.36 | v61.5,83.01 v48.75,83.01 32.76,83.01 29.82,80.08 IC18.3 | v68.5,98.09 75.49,98.09 v75.58,98
  Bottom 0.152: IC6.17 58.74,138.71 59.55,139.52 61.05,139.52 61.33,139.8 67.19,139.8 67.52,140.14 v68.58,140.14 | IC17.17 58.74,124.74 59.55,125.55 61.05,125.55 61.33,125.83 67.19,125.83 67.52,126.17 v68.58,126.17 | IC14.17 58.74,110.77 59.55,111.58 61.05,111.58 61.33,111.86 67.19,111.86 67.52,112.2 v68.58,112.2 | IC23.17 58.74,96.8 59.55,97.61 61.05,97.61 61.33,97.89 68.3,97.89 v68.5,98.09 | v75.58,140.09 v75.58,126.12 75.58,112.46 75.58,112.45 v75.58,112.15 v75.58,98 75.58,90.96 68.13,83.51 62,83.51 v61.5,83.01 v61.5,83 58.79,80.29 IC2.17 | v48.75,83.01 45.24,79.5 45,79.5 45,78.87 IC11.17
BUSB_BIT2  (via drill 0.35, 0.35 pad 0.55)
  Top 0.152: v68.58,111.29 76.14,111.29 v76.22,111.2 | v68.58,125.26 76.14,125.26 v76.22,125.17 | v68.58,139.23 76.14,139.23 v76.22,139.14 76.18,139.18 76.18,142.16 72.6,145.74 68.87,145.74 60.24,154.37 C.37 | v62.25,82.4 v49.5,82.4 33.4,82.4 31.09,80.09 IC18.4 | v68.5,97.18 76.04,97.18 v76.22,97
  Bottom 0.152: IC6.16 60.01,137.9 61.57,139.46 68.17,139.46 68.41,139.23 v68.58,139.23 | IC17.16 60.01,123.92 61.57,125.49 68.17,125.49 68.41,125.26 v68.58,125.26 | IC14.16 60.01,109.95 61.57,111.52 68.17,111.52 68.41,111.29 v68.58,111.29 | IC23.16 60.01,95.98 61.57,97.55 68.14,97.55 v68.5,97.18 | v76.22,139.14 v76.22,125.17 v76.22,111.2 v76.22,97 76.22,91.17 68.25,83.2 63.05,83.2 v62.25,82.4 61.89,82.4 60.06,80.58 IC2.16 | v49.5,82.4 46.37,79.27 IC11.16
BUSB_BIT3  (via drill 0.35, 0.35 pad 0.55)
  Top 0.152: v68.58,110.38 76.7,110.38 v76.83,110.25 | v68.58,124.35 76.7,124.35 v76.83,124.22 | v68.58,138.32 76.7,138.32 v76.83,138.19 76.83,141.95 72.73,146.05 69,146.05 61.22,153.82 61.22,159.14 60.24,160.12 C.38 | v62.82,81.68 50.32,81.68 v50.25,81.75 34.25,81.75 32.37,79.86 IC18.5 | v68.5,96.27 76.84,96.27 v76.86,96.25
  Bottom 0.152: v68.58,138.32 67.75,139.15 61.91,139.15 61.28,138.52 IC6.15 | v68.58,124.35 67.75,125.18 61.91,125.18 61.28,124.55 IC17.15 | v68.58,110.38 67.75,111.21 61.91,111.21 61.28,110.58 IC14.15 | IC23.15 61.28,96.61 61.91,97.24 67.53,97.24 v68.5,96.27 | v76.83,138.19 v76.83,124.22 v76.83,110.25 76.86,110.22 v76.86,96.25 76.86,91.39 68.38,82.9 64.03,82.9 v62.82,81.68 61.33,80.2 IC2.15 | v50.25,81.75 47.63,79.14 IC11.15
BUSB_BIT4  (via drill 0.35, 0.35 pad 0.55)
  Top 0.152: v68.58,123.44 77.33,123.44 v77.51,123.27 | v68.58,109.47 77.33,109.47 v77.51,109.3 | v68.58,137.41 77.33,137.41 v77.51,137.24 77.44,137.3 77.44,141.77 72.86,146.35 69.12,146.35 62.78,152.69 C.39 | v63.33,80.92 51.16,80.92 v51,81.08 34.83,81.08 33.63,79.89 IC18.6 | v68.5,95.36 77.39,95.36 v77.51,95.25
  Bottom 0.152: IC6.14 62.55,137.9 63.5,138.85 67.14,138.85 v68.58,137.41 | IC17.14 62.55,123.92 63.5,124.88 67.14,124.88 v68.58,123.44 | IC14.14 62.55,109.95 63.5,110.91 67.14,110.91 v68.58,109.47 | IC23.14 62.55,95.98 63.5,96.94 66.93,96.94 v68.5,95.36 | v77.51,137.24 v77.51,123.27 v77.51,109.3 v77.51,95.25 77.51,91.6 68.5,82.59 65.01,82.59 v63.33,80.92 62.6,80.18 IC2.14 | IC11.14 49.14,79.01 49.14,79.36 50.85,81.08 v51,81.08
BUSB_BIT5  (via drill 0.35, 0.35 pad 0.55)
  Top 0.152: v68.58,122.53 77.93,122.53 v78.15,122.31 | v68.58,108.56 77.93,108.56 v78.15,108.34 | v68.58,136.5 77.93,136.5 v78.15,136.28 78.15,141.49 72.98,146.66 69.25,146.66 63.76,152.14 63.76,159.14 62.78,160.12 C.40 | v51.75,80.28 | v51.75,80.28 35.78,80.28 34.91,79.41 IC18.7 | v68.5,94.46 77.94,94.46 v78.15,94.25 | v51.75,80.28 53.5,80.28 53.83,80.61 55.92,80.61 56.25,80.28 v64,80.28
  Bottom 0.152: IC6.13 63.82,137.87 64.45,138.5 66.63,138.5 68.58,136.55 v68.58,136.5 | IC17.13 63.82,123.9 64.45,124.53 66.63,124.53 68.58,122.58 v68.58,122.53 | IC14.13 63.82,109.93 64.45,110.56 66.63,110.56 68.58,108.61 v68.58,108.56 | IC23.13 63.82,95.96 64.45,96.59 66.36,96.59 v68.5,94.46 | v78.15,136.28 v78.15,122.31 v78.15,108.34 v78.15,94.25 78.15,91.81 68.63,82.29 66.01,82.29 v64,80.28 63.87,80.15 IC2.13 | IC11.13 50.17,79.13 51.33,80.28 v51.75,80.28
BUSB_BIT6  (via drill 0.35, 0.35 pad 0.55)
  Top 0.152: v68.58,107.65 78.53,107.65 v78.79,107.39 | v68.58,121.62 78.53,121.62 v78.79,121.36 | v68.58,135.59 78.53,135.59 v78.79,135.33 78.76,135.37 78.76,141.31 73.11,146.96 69.37,146.96 65.32,151.02 C.41 | IC18.8 36.17,77.83 v36.75,77.25 | v68.5,93.55 78.75,93.55 v78.79,93.5 | v51.5,77.25 v65.25,77.25
  Bottom 0.152: v68.58,135.59 67.39,136.78 67.39,137.31 66.5,138.2 65.72,138.2 65.09,137.56 IC6.12 | v68.58,121.62 67.39,122.81 67.39,123.34 66.5,124.23 65.72,124.23 65.09,123.59 IC17.12 | IC14.12 65.09,109.62 65.72,110.26 66.5,110.26 67.39,109.37 67.39,108.84 v68.58,107.65 | IC23.12 65.09,95.66 65.72,96.29 66.1,96.29 67.4,94.99 67.4,94.65 v68.5,93.55 | v78.79,135.33 v78.79,121.36 v78.79,107.39 v78.79,93.5 78.79,92.02 68.76,81.99 66.74,81.99 65.18,80.43 65.18,78.82 IC2.12 65.14,77.36 v65.25,77.25 | IC11.12 51.45,77.31 v51.5,77.25 v36.75,77.25
BUSB_BIT7  (via drill 0.35, 0.35 pad 0.55)
  Top 0.152: v68.58,106.74 79.13,106.74 v79.44,106.44 | v68.58,120.71 79.13,120.71 v79.44,120.41 | v68.58,134.68 79.13,134.68 v79.44,134.38 79.44,141.07 73.23,147.27 69.5,147.27 66.3,150.47 66.3,159.14 65.32,160.12 C.42 | IC18.9 37.45,77.45 v38.25,76.64 | v68.5,92.64 79.3,92.64 v79.44,92.5
  Bottom 0.152: IC6.11 66.95,136.32 68.58,134.69 v68.58,134.68 | IC17.11 66.95,122.35 68.58,120.72 v68.58,120.71 | IC14.11 66.95,108.38 68.58,106.75 v68.58,106.74 | v79.44,134.38 v79.44,120.41 v79.44,106.44 v79.44,92.5 79.44,92.23 68.88,81.68 67.75,81.68 66.41,80.34 IC2.11 66.41,77.55 65.5,76.64 57.36,76.64 56.5,75.79 56,75.79 55.14,76.64 52.75,76.64 | v38.25,76.64 52.75,76.64 | IC23.11 68.13,92.64 v68.5,92.64 | 52.75,76.64 52.72,76.68 IC11.11
BUSB_BIT8  (via drill 0.35)
  Top 0.152: v68.13,68.27 v74.49,68.27 74.49,86.64 80.04,92.19 80.04,140.89 73.36,147.57 69.63,147.57 67.86,149.34 C.43 | v68.13,40.33 v74.49,40.33 | v74.49,54.3 v68.13,54.3 | IC27.2 28.08,7.64 v31.77,11.34 | v68.25,26.25 v74.49,26.25
  Bottom 0.152: IC33.18 57.02,65.09 58.98,67.05 60.48,67.05 60.75,67.33 66.56,67.33 67.5,68.27 v68.13,68.27 | IC36.18 57.02,51.12 58.98,53.08 60.48,53.08 60.75,53.36 66.56,53.36 67.5,54.3 v68.13,54.3 | IC39.18 57.02,37.15 58.98,39.11 60.48,39.11 60.75,39.39 66.56,39.39 67.5,40.33 v68.13,40.33 | 74.49,53.98 v74.49,40.33 v74.49,26.25 | 74.49,53.98 v74.49,68.27 | v74.49,68.27 | 74.49,53.98 v74.49,54.3 | 60.35,11.4 48.03,11.4 48.01,11.39 | 60.35,11.4 67.52,11.4 74.49,18.37 v74.49,26.25 | IC24.18 57.04,7.99 60.35,11.3 60.35,11.4 | IC26.18 43.35,6.72 48.01,11.39 | 48.01,11.39 31.82,11.39 v31.77,11.34 | IC42.18 57.02,23.39 58.77,25.14 60.48,25.14 60.75,25.42 67.42,25.42 v68.25,26.25 | v74.49,26.25
BUSB_BIT9  (via drill 0.35, 0.35 pad 0.55)
  Top 0.152: v68.13,53.39 75.09,53.39 v75.13,53.34 | v68.13,39.42 75.09,39.42 v75.13,39.37 | v68.13,67.36 75.09,67.36 v75.13,67.31 75.13,86.34 80.35,91.56 80.35,141.02 73.49,147.88 69.75,147.88 68.84,148.79 68.84,159.14 67.86,160.12 C.44 | v61.02,10.6 v48.27,10.6 32.28,10.6 29.35,7.67 IC27.3 | v75.13,25.25 75.06,25.32 v68.25,25.32
  Bottom 0.152: IC33.17 58.29,65.93 59.1,66.75 60.6,66.75 60.88,67.02 66.69,67.02 67.02,67.36 v68.13,67.36 | IC36.17 58.29,51.96 59.1,52.77 60.6,52.77 60.88,53.05 66.69,53.05 67.02,53.39 v68.13,53.39 | IC39.17 58.29,37.99 59.1,38.8 60.6,38.8 60.88,39.08 66.69,39.08 67.02,39.42 v68.13,39.42 | v75.13,67.31 v75.13,53.34 75.13,39.68 v75.13,39.37 v75.13,25.25 75.13,18.58 67.65,11.1 61.52,11.1 v61.02,10.6 v61.02,10.59 58.31,7.88 IC24.17 | v48.27,10.6 44.76,7.09 44.52,7.09 44.52,6.46 IC26.17 | IC42.17 58.29,24.22 58.9,24.84 60.6,24.84 60.88,25.11 68.04,25.11 v68.25,25.32
BUSB_BIT10  (via drill 0.35, 0.35 pad 0.55)
  Top 0.152: v68.13,38.51 75.69,38.51 v75.78,38.42 | v68.13,52.48 75.69,52.48 v75.78,52.39 | v68.13,66.45 75.69,66.45 v75.78,66.36 75.78,86.56 80.65,91.43 80.65,141.14 73.61,148.18 71.25,148.18 70.4,149.03 C.45 | v61.77,9.99 v49.02,9.99 32.92,9.99 30.62,7.68 IC27.4 | v68.25,24.41 75.61,24.41 v75.78,24.25
  Bottom 0.152: IC33.16 59.56,65.12 61.12,66.68 67.73,66.68 67.96,66.45 v68.13,66.45 | IC36.16 59.56,51.15 61.12,52.71 67.73,52.71 67.96,52.48 v68.13,52.48 | IC39.16 59.56,37.18 61.12,38.74 67.73,38.74 67.96,38.51 v68.13,38.51 | v75.78,66.36 v75.78,52.39 v75.78,38.42 v75.78,24.25 75.78,18.8 67.78,10.79 62.57,10.79 v61.77,9.99 61.41,9.99 59.58,8.16 IC24.16 | v49.02,9.99 45.89,6.86 IC26.16 | IC42.16 59.56,23.31 61.06,24.81 67.83,24.81 67.93,24.71 67.95,24.71 v68.25,24.41
BUSB_BIT11  (via drill 0.35, 0.35 pad 0.55)
  Top 0.152: v68.13,37.6 76.26,37.6 v76.39,37.47 | v68.13,51.57 76.26,51.57 v76.39,51.44 | v68.13,65.54 76.26,65.54 v76.39,65.41 76.39,86.74 80.96,91.31 80.96,141.27 73.74,148.49 72,148.49 71.38,149.1 71.38,159.14 70.4,160.12 C.46 | v62.34,9.27 49.84,9.27 v49.77,9.34 33.77,9.34 31.89,7.46 IC27.5 | v68.25,23.5 v76.41,23.5 v76.42,23.5
  Bottom 0.152: v68.13,65.54 67.3,66.37 61.46,66.37 60.83,65.74 IC33.15 | v68.13,51.57 67.3,52.4 61.46,52.4 60.83,51.77 IC36.15 | v68.13,37.6 67.3,38.43 61.46,38.43 60.83,37.8 IC39.15 | v76.39,65.41 v76.39,51.44 v76.39,37.47 76.42,37.44 v76.42,23.5 76.42,19.01 67.9,10.49 63.55,10.49 v62.34,9.27 60.85,7.79 IC24.15 | v49.77,9.34 47.16,6.72 IC26.15 | IC42.15 60.83,23.83 61.5,24.5 67.25,24.5 v68.25,23.5
BUSB_BIT12  (via drill 0.35, 0.35 pad 0.55)
  Top 0.152: v68.13,50.66 76.89,50.66 v77.06,50.49 | v68.13,36.69 76.89,36.69 v77.06,36.52 | v68.13,64.63 76.89,64.63 v77.06,64.46 77.06,86.98 81.26,91.18 81.26,141.4 73.87,148.79 73.5,148.79 72.94,149.35 C.47 | v62.86,8.51 50.68,8.51 v50.52,8.67 34.35,8.67 33.16,7.47 IC27.6 | v77.06,22.5 76.97,22.59 v68.25,22.59
  Bottom 0.152: IC33.14 62.1,65.12 63.05,66.07 66.69,66.07 v68.13,64.63 | IC36.14 62.1,51.15 63.05,52.1 66.69,52.1 v68.13,50.66 | IC39.14 62.1,37.18 63.05,38.13 66.69,38.13 v68.13,36.69 | v77.06,64.46 v77.06,50.49 v77.06,36.52 v77.06,22.5 77.06,19.22 68.03,10.19 64.53,10.19 v62.86,8.51 62.12,7.77 IC24.14 | IC26.14 48.66,6.6 48.66,6.95 50.38,8.67 v50.52,8.67 | IC42.14 62.1,23.55 62.75,24.2 66.65,24.2 v68.25,22.59
BUSB_BIT13  (via drill 0.35, 0.35 pad 0.55)
  Top 0.152: v68.13,49.75 77.48,49.75 v77.7,49.53 | v68.13,35.78 77.48,35.78 v77.7,35.56 | v68.13,63.72 77.48,63.72 v77.7,63.5 77.7,87.19 81.57,91.06 81.57,141.52 73.92,149.17 73.92,159.14 72.94,160.12 C.48 | v51.27,7.87 52.75,7.87 53.08,8.2 56.55,8.2 56.88,7.87 v63.52,7.87 | v51.27,7.87 | v51.27,7.87 35.3,7.87 34.43,7 IC27.7 | v68.25,21.69 68.31,21.75 v77.7,21.75
  Bottom 0.152: IC33.13 63.37,65.09 64,65.73 66.18,65.73 68.13,63.77 v68.13,63.72 | IC36.13 63.37,51.12 64,51.76 66.18,51.76 68.13,49.8 v68.13,49.75 | IC39.13 63.37,37.15 64,37.79 66.18,37.79 68.13,35.83 v68.13,35.78 | v77.7,63.5 v77.7,49.53 v77.7,35.56 v77.7,21.75 77.7,19.43 68.15,9.88 65.53,9.88 v63.52,7.87 63.39,7.74 IC24.13 | IC26.13 49.7,6.72 50.85,7.87 v51.27,7.87 | IC42.13 63.37,23.51 63.75,23.89 66.05,23.89 v68.25,21.69
BUSB_BIT14  (via drill 0.35, 0.35 pad 0.55)
  Top 0.152: v68.13,34.87 78.08,34.87 v78.34,34.61 | v68.13,48.84 78.08,48.84 v78.34,48.58 | v68.13,62.81 78.08,62.81 v78.34,62.55 78.34,87.4 81.87,90.93 81.87,141.65 75.48,148.04 C.49 | IC27.8 35.7,5.42 v36.27,4.84 | v51.02,4.84 v64.77,4.84 | v68.25,20.78 78.32,20.78 v78.34,20.75
  Bottom 0.152: v68.13,62.81 66.94,64 66.94,64.53 66.05,65.42 65.27,65.42 64.64,64.79 IC33.12 | v68.13,48.84 66.94,50.03 66.94,50.56 66.05,51.45 65.27,51.45 64.64,50.82 IC36.12 | IC39.12 64.64,36.85 65.27,37.48 66.05,37.48 66.94,36.59 66.94,36.06 v68.13,34.87 | v78.34,62.55 v78.34,48.58 v78.34,34.61 v78.34,20.75 78.34,19.64 68.28,9.58 66.26,9.58 64.7,8.02 64.7,6.41 IC24.12 64.66,4.95 v64.77,4.84 | IC26.12 50.97,4.89 v51.02,4.84 v36.27,4.84 | v68.25,20.78 66.46,22.56 66.46,22.7 65.58,23.59 65,23.59 64.64,23.23 IC42.12
BUSB_BIT15  (via drill 0.35, 0.35 pad 0.55)
  Top 0.152: v68.13,47.93 78.68,47.93 v78.99,47.63 | v68.13,61.9 78.68,61.9 v78.99,61.6 78.99,87.61 82.18,90.8 82.18,141.78 76.98,146.98 76.98,158.62 75.48,160.12 C.50 | IC27.9 36.97,5.04 v37.77,4.23 | v67.78,19.96 73.37,19.96 73.6,20.2 74.11,20.2 74.3,20 v78.99,20 | v78.99,33.66 68.19,33.66 v68.13,33.71
  Bottom 0.152: IC33.11 66.51,63.54 68.13,61.92 v68.13,61.9 | IC36.11 66.51,49.57 68.13,47.95 v68.13,47.93 | v78.99,61.6 v78.99,47.63 v78.99,33.66 v78.99,20 78.99,19.85 68.41,9.27 67.27,9.27 65.93,7.93 IC24.11 65.93,5.14 64.29,3.5 52.25,3.5 | v37.77,4.23 38.51,3.5 52.25,3.5 | IC26.11 52.24,3.51 52.25,3.5 | IC42.11 67.58,19.96 v67.78,19.96 | v68.13,33.71 66.25,35.6 IC39.11
BUSB_REGIN0  (via drill 0.35)
  Top 0.152: v12,122 12,162.03 12.55,162.59 20.82,162.59 C.8
  Bottom 0.152: v12,122 10,122 9.5,121.5 V3.1
BUSB_REGIN1  (via drill 0.35)
  Top 0.152: v19.25,117.88 19.88,118.5 19.88,152.5 v22.12,154.75 | C.10 24.68,160.44 26,159.12 26,157.5 v25,156.5
  Bottom 0.152: v19.25,117.88 10.38,117.88 9.5,118.75 V3.2 | v22.12,154.75 22.38,155 23.5,155 v25,156.5
BUSB_REGIN2  (via drill 0.35)
  Top 0.152: C.12 27.19,161.29 25.59,162.89 11.05,162.89 9.88,161.72 9.88,161.5 11.38,160 11.38,117.12 v11.62,116.88
  Bottom 0.152: v11.62,116.88 10,116.88 9.5,116.38 V3.3
BUSB_REGOUT0  (via drill 0.35)
  Top 0.152: v4.38,99.25 5.12,100 5.12,133.98 6.61,135.47 6.61,158.98 10.88,163.25 27.78,163.25 C.14
  Bottom 0.152: v4.38,99.25 3.88,98.75 3.88,94.75 8.25,90.38 11,90.38 11,92.25 9.5,93.75 V4.1
BUSB_REGOUT1
  Bottom 0.152: C.16 30.14,162.65 11.24,162.65 7,158.41 7,150.12 4.88,148 4.88,99.61 4.98,99.5 4.98,98.98 4.18,98.18 4.18,95.88 8.79,91.27 V4.2
BUSB_REGOUT2
  Bottom 0.152: C.18 32.38,162.96 11.12,162.96 6.38,158.22 6.38,150.38 4.25,148.25 4.25,100.75 3.5,100 3.5,94.62 9.38,88.75 V4.3
CLK  (via drill 0.35)
  Top 0.152: IC21.12 31.43,107.38 32.32,108.27 32.32,110.32 31.43,111.21 IC7.12 31.43,121.35 32.32,122.24 32.32,124.29 31.43,125.18 IC15.12 31.43,135.32 32.32,136.21 32.32,138.26 31.43,139.15 IC4.12 31.36,144.93 31.36,149.19 23.27,157.27 23.27,159.23 22.75,159.75 21.75,159.75 21,160.5 21,161.5 20.25,162.25 19.19,162.25 18.39,161.44 18.39,159.94 C.5 | IC31.12 30.98,66.37 31.87,65.48 31.87,63.43 30.98,62.54 IC34.12 30.98,52.4 31.87,51.52 31.87,49.46 30.98,48.57 IC37.12 30.98,38.43 31.87,37.55 31.87,35.49 30.98,34.6 IC40.12 | v24.75,73.62 24.75,95.38 25.75,96.38 v25.75,101.75
  Bottom 0.152: v24.75,73.62 29.38,73.62 30.88,72.12 IC31.12 | v25.75,101.75 28.5,104.5 29.88,104.5 31.38,103 IC21.12
GND  (via drill 0.35)
  Top 0.152: v65.91,26.36 IC41.10 | v65.91,40.33 IC38.10 65.86,35.55 v65.86,33.38 | v65.91,68.27 65.91,63.85 | 65.91,63.85 IC32.10 | v65.91,54.3 IC35.10 65.86,49.52 v65.86,47.34 | IC31.11 IC31.10 28.44,58.14 | 28.44,58.14 IC34.11 | IC34.11 28.44,50.52 | 28.44,50.52 IC34.10 | IC34.10 IC37.11 | IC37.11 28.44,43.85 | 28.44,43.85 28.44,36.55 | 28.44,36.55 IC37.10 | IC37.10 28.44,30.2 | 28.44,30.2 IC40.11 | IC40.11 IC40.10 28.5,22.5 28.75,22.25 28.75,17.25 | v66.36,141.04 IC5.10 v66.36,134.06 | v66.36,127.08 IC16.10 v66.36,120.09 | v66.36,113.11 IC9.10 v66.36,106.12 | v66.36,99.14 IC22.10 | v65.86,61.31 65.86,63.8 65.91,63.85 | IC4.18 46.67,154.38 V2.8 44.78,155.65 43.23,157.2 42.49,157.2 41.21,155.92 41.21,154.62 40.69,154.1 39.95,154.1 38.41,155.65 V2.5 | IC37.10 28.39,36.55 28.44,36.55 | 28.44,43.85 28.39,43.85 IC37.11 | IC34.10 28.39,50.52 28.44,50.52 | 28.44,30.2 28.39,30.2 IC40.11 | IC34.11 28.39,58.14 28.44,58.14 | v28.89,147.71 IC4.11 IC4.10 IC15.11 IC15.10 IC7.11 29,116.88 29,109.38 IC7.10 IC21.11 IC21.10 28.62,95 34.25,89.38 34.25,87.25 34.5,87 39.12,87 39.38,87.25 39.38,88 41.75,90.38 49.25,90.38 49.62,90 49.62,89.5 49.5,89.38 49.5,87 53.12,87 53.38,87.25 53.38,87.75 v53.62,88 | IC1.10 65.88,78.78 | 65.88,78.78 IC1.9 IC1.8 IC1.7 IC1.6 IC1.5 IC1.4 IC1.3 IC1.2 | IC1.2 | V1.4 9.38,140.75 9.38,138.25 V1.5 9.38,138.12 7.75,136.5 7.75,132.25 9.38,130.62 V1.8 9.38,130.5 9.38,123.38 7.75,121.75 7.75,115.5 9.38,113.88 V3.4 9.38,113.75 9.38,111.25 V3.5 9.38,111.12 7.75,109.5 7.75,105.25 | 7.75,105.25 9.38,103.62 V3.8 | 7.75,105.25 7.75,87.88 9.38,86.25 V4.4 9.38,86.12 9.38,83.75 V4.5 9.38,83.62 7.75,82 7.75,77.75 9.38,76.12 V4.8 9.38,76 7.75,74.38 7.75,46.5
  Top 0.152: v65.88,74.5 65.88,78.78 | 7.75,46.5 7.75,23 V5.7 | 7.75,46.5 9.38,48.12 V6.7 | 28.75,17.25 28.75,14.75 27.5,13.5 27.5,5 28.88,3.62 38.12,3.62 38.5,4 38.5,6 38.25,6.25 IC27.10 | IC18.10 38.75,78.75 43.75,73.75 46.12,73.75 46.12,72.12 IC31.18 | v53.12,15.5 52.88,15.25 52.88,14.75 52.62,14.5 49.12,14.5 49.12,17 49.25,17.12 49.25,17.5 48.25,18.5 41.35,18.5 39.62,16.77 v39.62,16 | 28.75,17.25 v30,17.25 | IC25.10 53.77,7.9 55,7.9 55.77,7.12 IC20.2 IC20.3 IC20.4 IC20.5 IC20.6 IC20.7 IC20.8 IC20.9 64.75,6.38 65.88,6.38 IC20.10 68,8.43 v68,13 | IC10.10 54.17,80.23 55.52,80.23 56.25,79.5 IC1.2
  Top 0.5: C.4 C.3
  Bottom 0.152: v65.91,26.36 IC42.10 65.86,31.13 v65.86,33.38 | v65.91,40.33 IC39.10 65.86,45.1 v65.86,47.34 | IC37.18 44.64,42.55 30.03,42.55 IC37.11 28.39,44.14 25.26,47.26 25.25,47.25 10.38,47.25 9.5,48.12 V6.7 | IC34.18 44.64,56.52 30.03,56.52 IC34.11 | v65.91,68.27 IC33.10 65.88,73 v65.88,74.5 65.75,74.62 41.75,74.62 40.25,73.12 40.25,70.49 | IC31.18 44.64,70.49 40.25,70.49 | IC31.11 30.03,70.49 40.25,70.49 | v65.91,54.3 IC36.10 65.86,59.07 v65.86,61.31 | IC15.18 45.09,129.3 30.48,129.3 IC15.11 | IC7.18 45.09,115.33 30.48,115.33 IC7.11 | IC21.18 45.09,101.36 30.48,101.36 IC21.11 | v66.36,141.04 IC6.10 66.36,146.12 65.09,147.4 47.95,147.4 45.77,149.58 43.1,149.58 41.18,151.5 31.71,151.5 29.27,149.06 29.27,148.09 v28.89,147.71 | v66.36,127.08 IC17.10 v66.36,134.06 | v66.36,113.11 IC14.10 v66.36,120.09 | v66.36,99.14 IC23.10 v66.36,106.12 | IC40.18 44.64,28.58 30.03,28.58 IC40.11 | V2.5 V2.4 34.62,155.65 33.07,154.1 20.92,154.1 20.76,154.26 | IC4.18 46.05,144.85 44.5,143.31 41,143.31 41,143.53 40.7,143.83 40.7,146.49 41.21,147 41.21,149.36 39.68,150.89 33.13,150.89 31.36,149.12 31.36,146.88 30.66,146.18 30.21,146.18 IC4.11 | 20.76,154.26 C.3 | IC2.10 IC2.9 IC2.8 IC2.7 IC2.6 IC2.5 IC2.4 IC2.3 IC2.2 55.53,88.94 55.53,89.3 55.4,89.43 54.56,89.43 53.36,88.22 | IC11.10 53.36,88.22 | 52.91,15.84 52.88,15.81 52.88,15.75 v53.12,15.5 | 52.91,15.84 54.08,17.02 54.92,17.02 55.05,16.89 55.05,16.53 IC24.2 IC24.3 IC24.4 IC24.5 IC24.6 IC24.7 IC24.8 IC24.9 64.75,15.88 65.88,15.88 IC24.10 68,13.75 v68,13 | v53.62,88 53.38,88.25 53.36,88.22 | 20.76,154.26 11,144.5 11,140.88 9.5,140.88 V1.4
  Bottom 0.152: IC26.10 52.25,15.88 52.88,15.88 52.91,15.84 | v39.62,16 39,16.62 30.62,16.62 v30,17.25
N$1  (via drill 0.35)
  Top 0.152: v64.64,54.3 IC35.9
  Bottom 0.152: v64.64,54.3 IC36.9 64.64,59.37 63.69,60.33 43.99,60.33 41.77,58.11 IC34.16
N$2  (via drill 0.35)
  Top 0.152: v53.34,122.31 54.93,122.31 IC16.1 | v53.48,44.17 53.48,43.53 56.02,43.53 56.33,43.85 56.33,47.03 55.06,48.3 55.06,49.25 54.74,49.57 IC35.1 | v40.14,40.99 34.42,40.99 34.42,39.62 v34.38,39.62 | v12.75,37.62 12.75,32.25 9.5,29 V5.4 | v38.75,126.38 40.62,124.5 v40.62,121 | v7.12,40.38 6.5,41 6.5,102.38 6.75,102.62 6.75,122.88 v8.75,124.88
  Bottom 0.152: v53.34,122.31 51.51,120.49 51.5,120.5 41.12,120.5 v40.62,121 | v53.48,44.17 51.89,45.76 50.94,45.76 49.66,44.49 49.66,40.99 v40.14,40.99 | v34.38,39.62 34.12,39.88 15,39.88 v12.75,37.62 10,40.38 v7.12,40.38 | 19.88,126.38 19.88,130.38 17.12,133.12 V1.10 | v38.75,126.38 19.88,126.38 | v8.75,124.88 10.25,126.38 19.88,126.38
N$3  (via drill 0.35)
  Top 0.152: v55.38,61 55.38,59.41 55.7,59.09 IC35.19 | v55.88,133.74 55.88,132.16 56.2,131.84 IC16.19 | v26.12,56.75 26.38,57 v26.38,61.25 26.38,89 26.88,89.5 26.88,91.25 | 26.88,91.25 v26.88,144.88 | 26.88,91.25 v27.12,91.5
  Bottom 0.152: v55.38,61 55.06,60.68 26.95,60.68 v26.38,61.25 | v27.12,91.5 27.75,92.12 56.46,92.12 57,91.58 57.5,91.58 58.04,92.12 68.16,92.12 68.25,92.03 69.09,92.03 69.12,92 69.12,100 69.25,100.12 69.25,113.38 69.12,113.5 69.12,114 69.25,114.12 69.25,127.38 69.12,127.5 69.12,132.25 66.62,134.75 57,134.75 56,133.75 v55.88,133.74 | v26.12,56.75 10.38,56.75 9.5,55.88 V6.4 | V2.10 42.86,148.14 39.8,151.19 33,151.19 31.05,149.25 31.05,147 30.53,146.48 28.48,146.48 v26.88,144.88
N$4  (via drill 0.35)
  Top 0.152: v42.23,132.79 IC4.3 | v23.62,127.62 21.75,125.75 21.75,72 21.25,71.5 v21.25,62.88
  Bottom 0.152: IC31.2 IC31.3 44.67,62.9 44.62,62.88 v21.25,62.88 21,62.88 20.38,62.25 7.75,62.25 7.75,60 V6.3 | IC4.2 IC4.3 | v42.23,132.79 41.91,132.47 41.88,132.5 28.5,132.5 v23.62,127.62
N$5  (via drill 0.35)
  Top 0.152: v56.2,141.04 IC5.2
  Bottom 0.152: IC6.2 v56.2,141.04 40.32,141.04 IC4.7
N$6  (via drill 0.35)
  Top 0.152: IC5.3 v57.47,141.04 55.88,142.63 35.56,142.63 33.97,144.22 IC4.13
  Bottom 0.152: v57.47,141.04 IC6.3
N$7  (via drill 0.35)
  Top 0.152: v58.74,141.04 IC5.4
  Bottom 0.152: IC6.4 v58.74,141.04 58.1,140.41 42.23,140.41 IC4.6
N$8  (via drill 0.35)
  Top 0.152: IC5.5 v60.01,141.04 58.1,142.95 37.78,142.95 36.51,144.22 IC4.14
  Bottom 0.152: IC6.5 v60.01,141.04
N$9  (via drill 0.35)
  Top 0.152: v61.28,141.04 IC5.6
  Bottom 0.152: IC6.6 v61.28,141.04 60.67,140.44 58.77,140.44 58.1,139.78 44.13,139.78 IC4.5
N$10  (via drill 0.35)
  Top 0.152: IC5.7 v62.55,141.04 62.14,141.04 61.53,141.65 59.83,141.65 58.23,143.25 40.65,143.25 IC4.15
  Bottom 0.152: IC6.7 v62.55,141.04
N$11  (via drill 0.35)
  Top 0.152: v63.82,141.04 IC5.8
  Bottom 0.152: IC6.8 v63.82,141.04 63.18,140.41 61.07,140.41 60.8,140.13 59.1,140.13 58.1,139.14 46.04,139.14 IC4.4
N$12  (via drill 0.35)
  Top 0.152: v53.5,135.65 54.26,135.65 IC5.1 | v53.48,63.54 54.43,63.54 IC32.1 | v32.25,41 32.2,41 32.2,44.8 32.84,45.44 32.84,48.62 32.52,48.93 32.52,59.09 v34.74,61.31 34.62,61.38 32.25,63.75 32.25,73.38 27.88,77.75 27.88,94 27.5,94.38 v27.5,113.75
  Bottom 0.152: v53.5,135.65 28.89,135.65 28.88,135.62 17.12,135.62 V1.11 17,135.62 16.62,135.62 10.62,129.62 7.12,129.62 7.12,119.12 8.75,117.5 17.75,117.5 21.5,113.75 v27.5,113.75 | v53.48,63.54 51.25,61.31 v34.74,61.31 | v32.25,41 32,40.75 20.5,40.75 20.25,41 6.5,41 6.5,40.12 6.88,39.75 9.38,39.75 9.38,36.62 V5.1
N$13  (via drill 0.35)
  Top 0.152: v7.43,131.57 6,133 v6,134 | v6,135.75 6,135.29 3.56,132.84 3.56,92 5.16,90.39 5.16,86.25 | IC25.19 41.36,16.53 41.36,16.89 41.23,17.02 40.39,17.02 40.23,16.86 40.23,15.75 39.09,14.61 34.01,14.61 33.87,14.74 33.87,16.88 32.5,18.25 v30,18.25 | v26,18.25 24.18,20.07 8.25,20.07 5.16,23.16 5.16,86.25 | IC10.19 42.55,89.68 v42.5,89.73 | v4.61,86.25 5.16,86.25
  Bottom 0.152: V2.12 37.78,144.03 33.23,139.48 24.75,139.48 21.85,136.58 15.97,136.58 10.97,131.57 v7.43,131.57 | v6,134 v6,135.75 | v30,18.25 v26,18.25 | v42.5,89.73 42.41,89.64 21.56,89.64 19.45,87.54 14.02,87.54 12.25,85.77 10.88,85.77 10.41,85.3 5.56,85.3 v4.61,86.25
N$14  (via drill 0.35)